# EAGLE board lesion-256 (EAGLE 8.3.2)
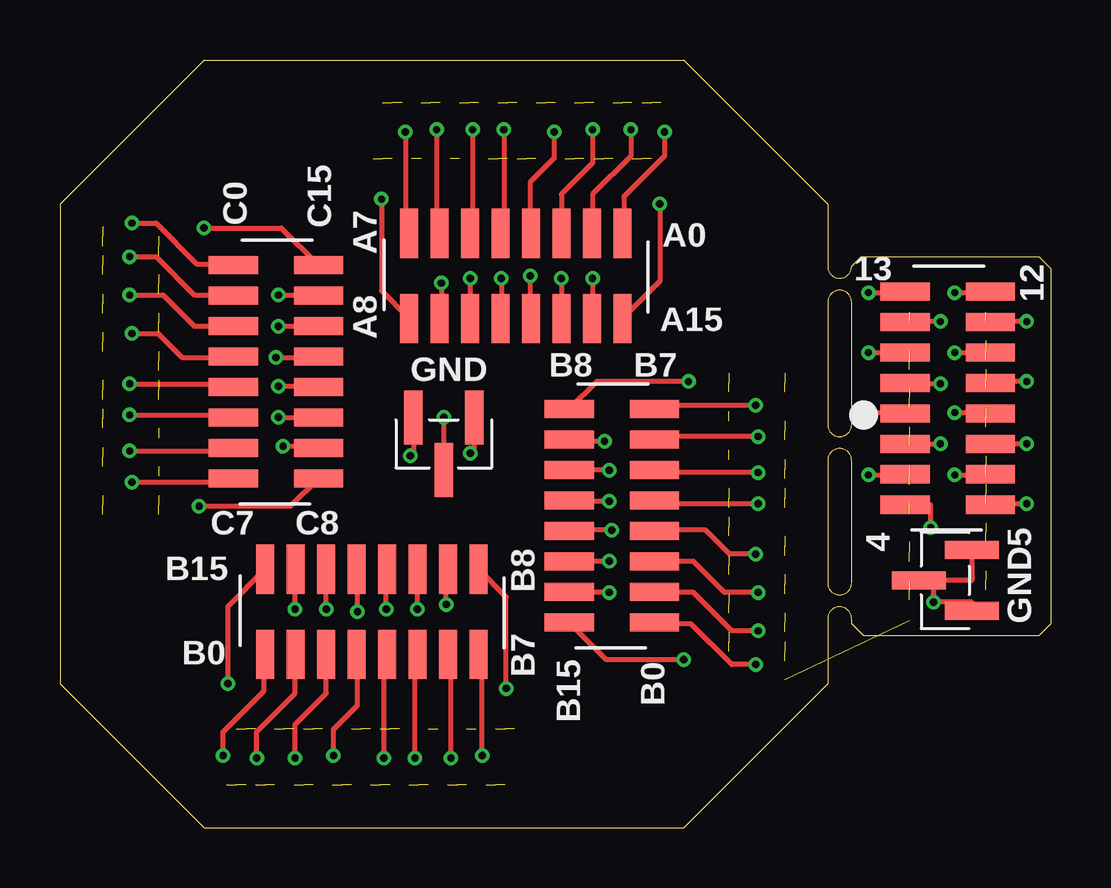
[diagram p0: board, top side]
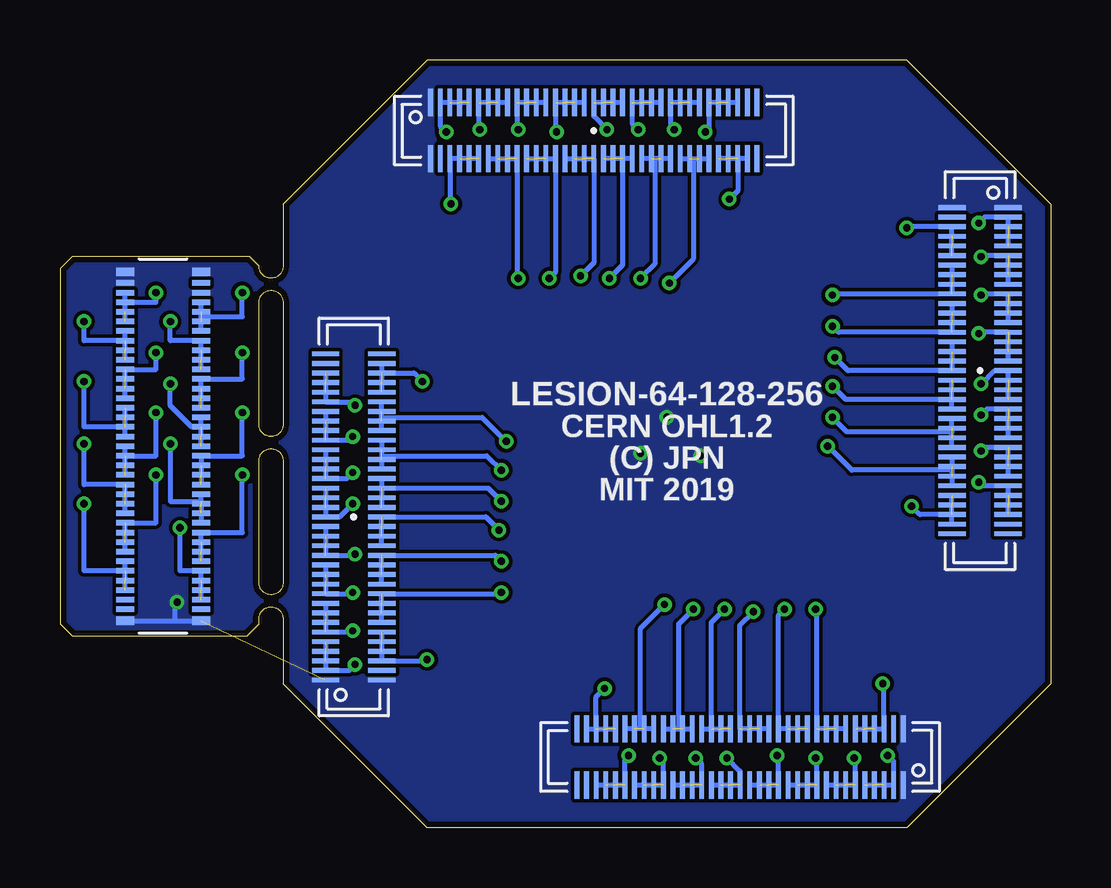
[diagram p1: board, bottom side, seen from below]

Size 41.3 x 32 mm. Coordinates in mm from the lower left corner, seen from the top.
Outline: 32,26 26,32 6,32 0,26 0,6 6,0 26,0 32,6 32,8.7 arc-90 32.5,9.2 arc-90 33,8.7 33,8.5 33.5,8 40.8,8 41.3,8.5 41.3,23.3 40.8,23.8 33.4,23.8 33,23.4 arc-90 32.5,22.9 arc-90 32,23.4 32,26
Outline: 33,21.9 arc90 32.5,22.4 arc90 32,21.9 32,16.8 arc90 32.5,16.3 arc90 33,16.8 33,21.9
Outline: 33,15.3 arc90 32.5,15.8 arc90 32,15.3 32,10.2 arc90 32.5,9.7 arc90 33,10.2 33,15.3
Copper layers (1*16): Top 0.035mm / dielectric 1.5mm / Bottom 0.035mm
Design rules "seeed-studio-2-layer *": minimum track width 6mil, minimum drill 0.3mm, track to track 6mil, track to pad 6mil, pad to pad 6mil, via to via 6mil, smd to smd 0mil, copper to edge 10mil, drill to drill 10mil, minimum pad ring 10mil, minimum via ring 6mil, stop-mask expansion 2mil, vias tented up to drill 100mil, thermal gap 10mil
Net classes: 1 thick: width 0.102 mm
tRestrict: 8 lines

## Footprints (pad centres in the part's own frame; a part is rotated, then mirrored left to right if it is on the bottom)
DF40-70HEAD-LESS-SILK = smd 0.23 x 0.75: 1 -6.8,-1.585; 2 -6.4,-1.585; 3 -6,-1.585; 4 -5.6,-1.585; 5 -5.2,-1.585; 6 -4.8,-1.585; 7 -4.4,-1.585; 8 -4,-1.585; 9 -3.6,-1.585; 10 -3.2,-1.585; 11 -2.8,-1.585; 12 -2.4,-1.585; 13 -2,-1.585; 14 -1.6,-1.585; 15 -1.2,-1.585; 16 -0.8,-1.585; 17 -0.4,-1.585; 18 0,-1.585; 19 0.4,-1.585; 20 0.8,-1.585; 21 1.2,-1.585; 22 1.6,-1.585; 23 2,-1.585; 24 2.4,-1.585; 25 2.8,-1.585; 26 3.2,-1.585; 27 3.6,-1.585; 28 4,-1.585; 29 4.4,-1.585; 30 4.8,-1.585; 31 5.2,-1.585; 32 5.6,-1.585; 33 6,-1.585; 34 6.4,-1.585; 35 6.8,-1.585; 36 6.8,1.585; 37 6.4,1.585; 38 6,1.585; 39 5.6,1.585; 40 5.2,1.585; 41 4.8,1.585; 42 4.4,1.585; 43 4,1.585; 44 3.6,1.585; 45 3.2,1.585; 46 2.8,1.585; 47 2.4,1.585; 48 2,1.585; 49 1.6,1.585; 50 1.2,1.585; 51 0.8,1.585; 52 0.4,1.585; 53 0,1.585; 54 -0.4,1.585; 55 -0.8,1.585; 56 -1.2,1.585; 57 -1.6,1.585; 58 -2,1.585; 59 -2.4,1.585; 60 -2.8,1.585; 61 -3.2,1.585; 62 -3.6,1.585; 63 -4,1.585; 64 -4.4,1.585; 65 -4.8,1.585; 66 -5.2,1.585; 67 -5.6,1.585; 68 -6,1.585; 69 -6.4,1.585; 70 -6.8,1.585 | smd 0.35 x 0.75: M1 -7.275,-1.585; M2 7.275,-1.585; M3 7.275,1.585; M4 -7.275,1.585
JP2X8_SMD_0.5" = smd 0.76 x 2.05: 1 -4.445,-1.775; 2 -3.175,-1.775; 3 -1.905,-1.775; 4 -0.635,-1.775; 5 0.635,-1.775; 6 1.905,-1.775; 7 3.175,-1.775; 8 4.445,-1.775; 9 4.445,1.775; 10 3.175,1.775; 11 1.905,1.775; 12 0.635,1.775; 13 -0.635,1.775; 14 -1.905,1.775; 15 -3.175,1.775; 16 -4.445,1.775
JP3_SMD-0.05 = smd 0.76 x 2.25: 1 -1.27,1.1; 2 0,-1.1; 3 1.27,1.1
DF40-70REC = smd 0.2 x 1.14: 1 -6.8,1.17; 2 -6.4,1.17; 3 -6,1.17; 4 -5.6,1.17; 5 -5.2,1.17; 6 -4.8,1.17; 7 -4.4,1.17; 8 -4,1.17; 9 -3.6,1.17; 10 -3.2,1.17; 11 -2.8,1.17; 12 -2.4,1.17; 13 -2,1.17; 14 -1.6,1.17; 15 -1.2,1.17; 16 -0.8,1.17; 17 -0.4,1.17; 18 0,1.17; 19 0.4,1.17; 20 0.8,1.17; 21 1.2,1.17; 22 1.6,1.17; 23 2,1.17; 24 2.4,1.17; 25 2.8,1.17; 26 3.2,1.17; 27 3.6,1.17; 28 4,1.17; 29 4.4,1.17; 30 4.8,1.17; 31 5.2,1.17; 32 5.6,1.17; 33 6,1.17; 34 6.4,1.17; 35 6.8,1.17; 36 6.8,-1.17; 37 6.4,-1.17; 38 6,-1.17; 39 5.6,-1.17; 40 5.2,-1.17; 41 4.8,-1.17; 42 4.4,-1.17; 43 4,-1.17; 44 3.6,-1.17; 45 3.2,-1.17; 46 2.8,-1.17; 47 2.4,-1.17; 48 2,-1.17; 49 1.6,-1.17; 50 1.2,-1.17; 51 0.8,-1.17; 52 0.4,-1.17; 53 0,-1.17; 54 -0.4,-1.17; 55 -0.8,-1.17; 56 -1.2,-1.17; 57 -1.6,-1.17; 58 -2,-1.17; 59 -2.4,-1.17; 60 -2.8,-1.17; 61 -3.2,-1.17; 62 -3.6,-1.17; 63 -4,-1.17; 64 -4.4,-1.17; 65 -4.8,-1.17; 66 -5.2,-1.17; 67 -5.6,-1.17; 68 -6,-1.17; 69 -6.4,-1.17; 70 -6.8,-1.17

## Placement (x,y rotation side)
J1  DF40C-70DP-0.4V(51)  [DF40-70HEAD-LESS-SILK]  37,15.9 270 bottom
J2  [JP2X8_SMD_0.5"]  9,19 270 top
J3  [JP2X8_SMD_0.5"]  19,23 180 top
J4  [JP2X8_SMD_0.5"]  37,17.9 90 top
J5  [JP3_SMD-0.05]  16,16 0 top
J6  [JP2X8_SMD_0.5"]  23,13 90 top
J7  [JP3_SMD-0.05]  36.9,10.3 270 top
J8  [JP2X8_SMD_0.5"]  13,9 0 top
JA1  DF40C(2.0)-70DS-0.4V(51)  [DF40-70REC]  2.95,19.05 270 bottom
JA3  DF40C(2.0)-70DS-0.4V(51)  [DF40-70REC]  19.05,29.05 0 bottom
JA5  DF40C(2.0)-70DS-0.4V(51)  [DF40-70REC]  29.05,12.95 90 bottom
JA7  DF40C(2.0)-70DS-0.4V(51)  [DF40-70REC]  12.95,2.95 180 bottom

## Library data of the parts
J1-J8 JA1 JA3 JA5 JA7 = jonnew

## Nets
AGND: J1.1 J1.69 J1.M1 J1.M2 J1.M3 J1.M4 J5.1 J5.2 J5.3 J7.1 J7.2 J7.3 JA1.1 JA1.70 JA3.1 JA3.70 JA5.1 JA5.70 JA7.1 JA7.70
N$1: J1.53 J1.54 J1.55 J1.56 J4.12
N$2: J1.57 J1.58 J1.59 J1.60 J4.11
N$3: J1.61 J1.62 J1.63 J1.64 J4.10
N$4: J1.2 J1.3 J1.4 J1.5 J4.8
N$5: J1.65 J1.66 J1.67 J1.68 J4.9
N$6: J1.10 J1.11 J1.12 J1.13 J4.6
N$7: J1.14 J1.15 J1.16 J1.17 J4.5
N$8: J1.18 J1.19 J1.20 J1.21 J4.4
N$9: J1.22 J1.23 J1.24 J1.25 J4.3
N$10: J1.26 J1.27 J1.28 J1.29 J4.2
N$11: J1.30 J1.31 J1.32 J1.33 J4.1
N$12: J1.37 J1.38 J1.39 J1.40 J4.16
N$13: J1.41 J1.42 J1.43 J1.44 J4.15
N$14: J1.45 J1.46 J1.47 J1.48 J4.14
N$15: J1.49 J1.50 J1.51 J1.52 J4.13
N$16: J2.1 JA1.2 JA1.3 JA1.4 JA1.5
N$17: J2.2 JA1.6 JA1.7 JA1.8 JA1.9
N$18: J2.3 JA1.10 JA1.11 JA1.12 JA1.13
N$19: J2.4 JA1.14 JA1.15 JA1.16 JA1.17
N$20: J2.5 JA1.18 JA1.19 JA1.20 JA1.21
N$21: J2.6 JA1.22 JA1.23 JA1.24 JA1.25
N$22: J2.7 JA1.26 JA1.27 JA1.28 JA1.29
N$23: J2.8 JA1.30 JA1.31 JA1.32 JA1.33
N$24: J2.9 JA1.37 JA1.38 JA1.39 JA1.40
N$25: J2.10 JA1.41 JA1.42 JA1.43 JA1.44
N$26: J2.11 JA1.45 JA1.46 JA1.47 JA1.48
N$27: J2.12 JA1.49 JA1.50 JA1.51 JA1.52
N$28: J2.13 JA1.53 JA1.54 JA1.55 JA1.56
N$29: J2.14 JA1.57 JA1.58 JA1.59 JA1.60
N$30: J2.15 JA1.61 JA1.62 JA1.63 JA1.64
N$31: J2.16 JA1.65 JA1.66 JA1.67 JA1.68
N$32: J1.6 J1.7 J1.8 J1.9 J4.7
N$33: J3.1 JA3.2 JA3.3 JA3.4 JA3.5
N$34: J3.2 JA3.6 JA3.7 JA3.8 JA3.9
N$35: J3.3 JA3.10 JA3.11 JA3.12 JA3.13
N$36: J3.4 JA3.14 JA3.15 JA3.16 JA3.17
N$37: J3.5 JA3.18 JA3.19 JA3.20 JA3.21
N$38: J3.6 JA3.22 JA3.23 JA3.24 JA3.25
N$39: J3.7 JA3.26 JA3.27 JA3.28 JA3.29
N$40: J3.8 JA3.30 JA3.31 JA3.32 JA3.33
N$41: J3.9 JA3.37 JA3.38 JA3.39 JA3.40
N$42: J3.10 JA3.41 JA3.42 JA3.43 JA3.44
N$43: J3.11 JA3.45 JA3.46 JA3.47 JA3.48
N$44: J3.12 JA3.49 JA3.50 JA3.51 JA3.52
N$45: J3.13 JA3.53 JA3.54 JA3.55 JA3.56
N$46: J3.14 JA3.57 JA3.58 JA3.59 JA3.60
N$47: J3.15 JA3.61 JA3.62 JA3.63 JA3.64
N$48: J3.16 JA3.65 JA3.66 JA3.67 JA3.68
N$65: J6.1 JA5.2 JA5.3 JA5.4 JA5.5
N$66: J6.2 JA5.6 JA5.7 JA5.8 JA5.9
N$67: J6.3 JA5.10 JA5.11 JA5.12 JA5.13
N$68: J6.4 JA5.14 JA5.15 JA5.16 JA5.17
N$69: J6.5 JA5.18 JA5.19 JA5.20 JA5.21
N$70: J6.6 JA5.22 JA5.23 JA5.24 JA5.25
N$71: J6.7 JA5.26 JA5.27 JA5.28 JA5.29
N$72: J6.8 JA5.30 JA5.31 JA5.32 JA5.33
N$73: J6.9 JA5.37 JA5.38 JA5.39 JA5.40
N$74: J6.10 JA5.41 JA5.42 JA5.43 JA5.44
N$75: J6.11 JA5.45 JA5.46 JA5.47 JA5.48
N$76: J6.12 JA5.49 JA5.50 JA5.51 JA5.52
N$77: J6.13 JA5.53 JA5.54 JA5.55 JA5.56
N$78: J6.14 JA5.57 JA5.58 JA5.59 JA5.60
N$79: J6.15 JA5.61 JA5.62 JA5.63 JA5.64
N$80: J6.16 JA5.65 JA5.66 JA5.67 JA5.68
N$97: J8.1 JA7.2 JA7.3 JA7.4 JA7.5
N$98: J8.2 JA7.6 JA7.7 JA7.8 JA7.9
N$99: J8.3 JA7.10 JA7.11 JA7.12 JA7.13
N$100: J8.4 JA7.14 JA7.15 JA7.16 JA7.17
N$101: J8.5 JA7.18 JA7.19 JA7.20 JA7.21
N$102: J8.6 JA7.22 JA7.23 JA7.24 JA7.25
N$103: J8.7 JA7.26 JA7.27 JA7.28 JA7.29
N$104: J8.8 JA7.30 JA7.31 JA7.32 JA7.33
N$105: J8.9 JA7.37 JA7.38 JA7.39 JA7.40
N$106: J8.10 JA7.41 JA7.42 JA7.43 JA7.44
N$107: J8.11 JA7.45 JA7.46 JA7.47 JA7.48
N$108: J8.12 JA7.49 JA7.50 JA7.51 JA7.52
N$109: J8.13 JA7.53 JA7.54 JA7.55 JA7.56
N$110: J8.14 JA7.57 JA7.58 JA7.59 JA7.60
N$111: J8.15 JA7.61 JA7.62 JA7.63 JA7.64
N$112: J8.16 JA7.65 JA7.66 JA7.67 JA7.68

## Tracks (layer width: path | path; a pad name or v marks a point on that pad's centre or on a via)
AGND  (via drill 0.3)  (1 unrouted)
  Top 0.2: J5.2 v16,17.1 | J5.1 14.73,15.63 v14.6,15.5 | J5.3 17.27,15.77 v17.1,15.6 | J7.3 38,9.4 v36.42,9.4 36.42,10.3 | 36.42,10.3 J7.2 | J7.1 38,10.3 36.42,10.3
  Bottom 0.2: J1.M2 J1.M3 | 36.5,8.62 36.5,9.4 v36.42,9.4
  pour Bottom (no thermals): -11.7,42.3 51.3,42.3 51.3,-19 -20.9,-37.4
N$1  (via drill 0.3)  (2 unrouted)
  Top 0.2: v36.7,18.5 35.23,18.5 J4.12
  Bottom 0.2: J1.53 J1.56 | v36.7,18.5 36.7,17.59 35.81,16.7 J1.55
N$2  (via drill 0.3)  (2 unrouted)
  Top 0.2: v33.7,19.8 J4.11
  Bottom 0.2: J1.57 J1.60 33.7,18.7 v33.7,19.8
N$3  (via drill 0.3)  (2 unrouted)
  Top 0.2: v36.7,21.1 35.23,21.1 J4.10
  Bottom 0.2: J1.61 J1.64 36.7,20.3 v36.7,21.1
N$4  (via drill 0.3)  (1 unrouted)
  Top 0.2: v37.3,22.3 38.77,22.3 J4.8
  Bottom 0.2: J1.5 J1.3 | J1.3 J1.2 | J1.3 37.3,21.9 v37.3,22.3
N$5  (via drill 0.3)  (2 unrouted)
  Top 0.2: v33.7,22.3 35.23,22.3 J4.9
  Bottom 0.2: J1.65 35.41,21.3 | 35.41,21.3 J1.68 | 35.41,21.3 33.7,21.3 v33.7,22.3
N$6  (via drill 0.3)  (2 unrouted)
  Top 0.2: v37.3,19.8 J4.6
  Bottom 0.2: J1.13 J1.10 37.3,19.1 v37.3,19.8
N$7  (via drill 0.3)  (2 unrouted)
  Top 0.2: v40.3,18.6 38.77,18.6 J4.5
  Bottom 0.2: J1.17 J1.14 | J1.16 40.3,16.7 v40.3,18.6
N$8  (via drill 0.3)  (2 unrouted)
  Top 0.2: v37.3,17.3 38.77,17.3 J4.4
  Bottom 0.2: J1.21 J1.18 | J1.19 37.3,15.5 v37.3,17.3
N$9  (via drill 0.3)  (2 unrouted)
  Top 0.2: v40.3,16 J4.3
  Bottom 0.2: J1.25 J1.22 40.3,14.3 v40.3,16
N$10  (via drill 0.3)  (2 unrouted)
  Top 0.2: v37.3,14.7 38.77,14.7 | 39.5,14.7 38.77,14.7 | 38.77,14.7 J4.2
  Bottom 0.2: J1.29 J1.26 37.3,12.7 v37.3,14.7
N$11  (via drill 0.3)  (2 unrouted)
  Top 0.2: v40.3,13.5 38.77,13.5 J4.1
  Bottom 0.2: J1.33 J1.30 | J1.31 40.3,10.7 v40.3,13.5
N$12  (via drill 0.3)  (2 unrouted)
  Top 0.2: v36.3,12.5 36.3,13.46 J4.16
  Bottom 0.2: J1.37 J1.40 36.3,10.7 v36.3,12.5
N$13  (via drill 0.3)  (2 unrouted)
  Top 0.2: v33.7,14.7 35.23,14.7 J4.15
  Bottom 0.2: J1.41 J1.44 33.7,12.3 v33.7,14.7
N$14  (via drill 0.3)  (2 unrouted)
  Top 0.2: J4.14 v36.7,15.99 v36.7,16
  Bottom 0.2: 35.41,13.6 J1.45 | 35.41,13.6 J1.48 | v36.7,16 36.7,13.6 35.41,13.6
N$15  (via drill 0.3)  (2 unrouted)
  Top 0.2: v33.7,17.3 35.23,17.3 J4.13
  Bottom 0.2: J1.49 J1.52 33.7,15.5 v33.7,17.3
N$16  (via drill 0.3)  (2 unrouted)
  Top 0.2: v3,25.2 4,25.2 5.7,23.5 7.17,23.5 J2.1
  Bottom 0.2: JA1.5 JA1.2 2.75,25.45 v3,25.2
N$17  (via drill 0.3)  (2 unrouted)
  Top 0.2: v2.9,23.8 4,23.8 5.6,22.2 7.2,22.2 J2.2
  Bottom 0.2: JA1.9 JA1.6 2.85,23.85 v2.9,23.8
N$18  (via drill 0.3)  (2 unrouted)
  Top 0.2: v2.9,22.2 4.3,22.2 5.6,20.9 J2.3
  Bottom 0.2: JA1.13 JA1.10 2.85,22.25 v2.9,22.2
N$19  (via drill 0.3)  (2 unrouted)
  Top 0.2: v3,20.6 4.1,20.6 5.1,19.6 7.19,19.6 J2.4
  Bottom 0.2: JA1.17 JA1.14 2.95,20.65 v3,20.6
N$20  (via drill 0.3)  (2 unrouted)
  Top 0.2: v2.9,18.5 7.09,18.5 J2.5
  Bottom 0.2: JA1.21 JA1.18 2.35,19.05 v2.9,18.5
N$21  (via drill 0.3)  (2 unrouted)
  Top 0.2: v2.9,17.2 7.12,17.2 J2.6
  Bottom 0.2: JA1.25 JA1.22 2.65,17.45 v2.9,17.2
N$22  (via drill 0.3)  (2 unrouted)
  Top 0.2: v2.9,15.7 7.1,15.7 J2.7
  Bottom 0.2: JA1.29 JA1.26 2.75,15.85 v2.9,15.7
N$23  (via drill 0.3)  (2 unrouted)
  Top 0.2: v3,14.4 7.07,14.4 J2.8
  Bottom 0.2: JA1.33 JA1.30 2.85,14.25 v3,14.4
N$24  (via drill 0.3)  (2 unrouted)
  Top 0.2: v5.8,13.4 9.62,13.4 J2.9
  Bottom 0.2: JA1.37 JA1.40 | JA1.38 5.45,13.05 v5.8,13.4
N$25  (via drill 0.3)  (2 unrouted)
  Top 0.2: v9.3,15.9 10.7,15.9 J2.10
  Bottom 0.2: JA1.44 4.12,14.9 | 4.12,14.9 JA1.41 | 4.12,14.9 8.3,14.9 v9.3,15.9
N$26  (via drill 0.3)  (2 unrouted)
  Top 0.2: v9.1,17.1 J2.11
  Bottom 0.2: JA1.45 4.12,16.5 | 4.12,16.5 JA1.48 | 4.12,16.5 8.5,16.5 v9.1,17.1
N$27  (via drill 0.3)  (2 unrouted)
  Top 0.2: v9.1,18.4 10.74,18.4 J2.12
  Bottom 0.2: JA1.49 JA1.52 | JA1.50 8.55,17.85 v9.1,18.4
N$28  (via drill 0.3)  (2 unrouted)
  Top 0.2: v9,19.6 10.74,19.6 J2.13
  Bottom 0.2: JA1.56 JA1.53 8.45,19.05 v9,19.6
N$29  (via drill 0.3)  (2 unrouted)
  Top 0.2: v9.1,20.9 J2.14
  Bottom 0.2: JA1.60 JA1.57 8.85,20.65 v9.1,20.9
N$30  (via drill 0.3)  (2 unrouted)
  Top 0.2: v9.1,22.2 10.75,22.2 J2.15
  Bottom 0.2: JA1.64 JA1.61 9.05,22.25 v9.1,22.2
N$31  (via drill 0.3)  (2 unrouted)
  Top 0.2: v6,25 9.22,25 J2.16
  Bottom 0.2: JA1.65 JA1.68 5.95,25.05 v6,25
N$32  (via drill 0.3)  (2 unrouted)
  Top 0.2: v40.3,21.1 38.77,21.1 J4.7
  Bottom 0.2: J1.9 J1.6 | J1.7 40.3,20.3 v40.3,21.1
N$33  (via drill 0.3)  (2 unrouted)
  Top 0.2: v25.2,29 25.2,28 23.5,26.3 23.5,24.83 J3.1
  Bottom 0.2: JA3.5 JA3.2 25.45,29.25 v25.2,29
N$34  (via drill 0.3)  (2 unrouted)
  Top 0.2: v23.8,29.1 23.8,28 22.2,26.4 22.2,24.8 J3.2
  Bottom 0.2: JA3.9 JA3.6 23.85,29.15 v23.8,29.1
N$35  (via drill 0.3)  (2 unrouted)
  Top 0.2: v22.2,29.1 22.2,27.7 20.9,26.4 J3.3
  Bottom 0.2: JA3.13 JA3.10 22.25,29.15 v22.2,29.1
N$36  (via drill 0.3)  (2 unrouted)
  Top 0.2: v20.6,29 20.6,27.9 19.6,26.9 19.6,24.81 J3.4
  Bottom 0.2: JA3.17 JA3.14 20.65,29.05 v20.6,29
N$37  (via drill 0.3)  (2 unrouted)
  Top 0.2: v18.5,29.1 18.5,24.91 J3.5
  Bottom 0.2: JA3.21 JA3.18 19.05,29.65 v18.5,29.1
N$38  (via drill 0.3)  (2 unrouted)
  Top 0.2: v17.2,29.1 17.2,24.88 J3.6
  Bottom 0.2: JA3.25 JA3.22 17.45,29.35 v17.2,29.1
N$39  (via drill 0.3)  (2 unrouted)
  Top 0.2: v15.7,29.1 15.7,24.9 J3.7
  Bottom 0.2: JA3.29 JA3.26 15.85,29.25 v15.7,29.1
N$40  (via drill 0.3)  (2 unrouted)
  Top 0.2: v14.4,29 14.4,24.93 J3.8
  Bottom 0.2: JA3.33 JA3.30 14.25,29.15 v14.4,29
N$41  (via drill 0.3)  (2 unrouted)
  Top 0.2: v13.4,26.2 13.4,22.38 J3.9
  Bottom 0.2: JA3.37 JA3.40 | JA3.38 13.05,26.55 v13.4,26.2
N$42  (via drill 0.3)  (2 unrouted)
  Top 0.2: v15.9,22.7 15.9,21.3 J3.10
  Bottom 0.2: JA3.44 14.9,27.88 | 14.9,27.88 JA3.41 | 14.9,27.88 14.9,23.7 v15.9,22.7
N$43  (via drill 0.3)  (2 unrouted)
  Top 0.2: v17.1,22.9 J3.11
  Bottom 0.2: JA3.45 16.5,27.88 | 16.5,27.88 JA3.48 | 16.5,27.88 16.5,23.5 v17.1,22.9
N$44  (via drill 0.3)  (2 unrouted)
  Top 0.2: v18.4,22.9 18.4,21.26 J3.12
  Bottom 0.2: JA3.49 JA3.52 | JA3.50 17.85,23.45 v18.4,22.9
N$45  (via drill 0.3)  (2 unrouted)
  Top 0.2: v19.6,23 19.6,21.26 J3.13
  Bottom 0.2: JA3.56 JA3.53 19.05,23.55 v19.6,23
N$46  (via drill 0.3)  (2 unrouted)
  Top 0.2: v20.9,22.9 J3.14
  Bottom 0.2: JA3.60 JA3.57 20.65,23.15 v20.9,22.9
N$47  (via drill 0.3)  (2 unrouted)
  Top 0.2: v22.2,22.9 22.2,21.25 J3.15
  Bottom 0.2: JA3.64 JA3.61 22.25,22.95 v22.2,22.9
N$48  (via drill 0.3)  (2 unrouted)
  Top 0.2: v25,26 25,22.78 J3.16
  Bottom 0.2: JA3.65 JA3.68 25.05,26.05 v25,26
N$65  (via drill 0.3)  (2 unrouted)
  Top 0.2: v29,6.8 28,6.8 26.3,8.5 24.83,8.5 J6.1
  Bottom 0.2: JA5.5 JA5.2 29.25,6.55 v29,6.8
N$66  (via drill 0.3)  (2 unrouted)
  Top 0.2: v29.1,8.2 28,8.2 26.4,9.8 24.8,9.8 J6.2
  Bottom 0.2: JA5.9 JA5.6 29.15,8.15 v29.1,8.2
N$67  (via drill 0.3)  (2 unrouted)
  Top 0.2: v29.1,9.8 27.7,9.8 26.4,11.1 J6.3
  Bottom 0.2: JA5.13 JA5.10 29.15,9.75 v29.1,9.8
N$68  (via drill 0.3)  (2 unrouted)
  Top 0.2: v29,11.4 27.9,11.4 26.9,12.4 24.81,12.4 J6.4
  Bottom 0.2: JA5.17 JA5.14 29.05,11.35 v29,11.4
N$69  (via drill 0.3)  (2 unrouted)
  Top 0.2: v29.1,13.5 24.91,13.5 J6.5
  Bottom 0.2: JA5.21 JA5.18 29.65,12.95 v29.1,13.5
N$70  (via drill 0.3)  (2 unrouted)
  Top 0.2: v29.1,14.8 24.88,14.8 J6.6
  Bottom 0.2: JA5.25 JA5.22 29.35,14.55 v29.1,14.8
N$71  (via drill 0.3)  (2 unrouted)
  Top 0.2: v29.1,16.3 24.9,16.3 J6.7
  Bottom 0.2: JA5.29 JA5.26 29.25,16.15 v29.1,16.3
N$72  (via drill 0.3)  (2 unrouted)
  Top 0.2: v29,17.6 24.93,17.6 J6.8
  Bottom 0.2: JA5.33 JA5.30 29.15,17.75 v29,17.6
N$73  (via drill 0.3)  (2 unrouted)
  Top 0.2: v26.2,18.6 22.38,18.6 J6.9
  Bottom 0.2: JA5.37 JA5.40 | JA5.38 26.55,18.95 v26.2,18.6
N$74  (via drill 0.3)  (2 unrouted)
  Top 0.2: v22.7,16.1 21.3,16.1 J6.10
  Bottom 0.2: JA5.44 27.88,17.1 | 27.88,17.1 JA5.41 | 27.88,17.1 23.7,17.1 v22.7,16.1
N$75  (via drill 0.3)  (2 unrouted)
  Top 0.2: v22.9,14.9 J6.11
  Bottom 0.2: JA5.45 27.88,15.5 | 27.88,15.5 JA5.48 | 27.88,15.5 23.5,15.5 v22.9,14.9
N$76  (via drill 0.3)  (2 unrouted)
  Top 0.2: v22.9,13.6 21.26,13.6 J6.12
  Bottom 0.2: JA5.49 JA5.52 | JA5.50 23.45,14.15 v22.9,13.6
N$77  (via drill 0.3)  (2 unrouted)
  Top 0.2: v23,12.4 21.26,12.4 J6.13
  Bottom 0.2: JA5.56 JA5.53 23.55,12.95 v23,12.4
N$78  (via drill 0.3)  (2 unrouted)
  Top 0.2: v22.9,11.1 J6.14
  Bottom 0.2: JA5.60 JA5.57 23.15,11.35 v22.9,11.1
N$79  (via drill 0.3)  (2 unrouted)
  Top 0.2: v22.9,9.8 21.25,9.8 J6.15
  Bottom 0.2: JA5.64 JA5.61 22.95,9.75 v22.9,9.8
N$80  (via drill 0.3)  (2 unrouted)
  Top 0.2: v26,7 22.78,7 J6.16
  Bottom 0.2: JA5.65 JA5.68 26.05,6.95 v26,7
N$97  (via drill 0.3)  (2 unrouted)
  Top 0.2: v6.8,3 6.8,4 8.5,5.7 8.5,7.17 J8.1
  Bottom 0.2: JA7.5 JA7.2 6.55,2.75 v6.8,3
N$98  (via drill 0.3)  (2 unrouted)
  Top 0.2: v8.2,2.9 8.2,4 9.8,5.6 9.8,7.2 J8.2
  Bottom 0.2: JA7.9 JA7.6 8.15,2.85 v8.2,2.9
N$99  (via drill 0.3)  (2 unrouted)
  Top 0.2: v9.8,2.9 9.8,4.3 11.1,5.6 J8.3
  Bottom 0.2: JA7.13 JA7.10 9.75,2.85 v9.8,2.9
N$100  (via drill 0.3)  (2 unrouted)
  Top 0.2: v11.4,3 11.4,4.1 12.4,5.1 12.4,7.19 J8.4
  Bottom 0.2: JA7.17 JA7.14 11.35,2.95 v11.4,3
N$101  (via drill 0.3)  (2 unrouted)
  Top 0.2: v13.5,2.9 13.5,7.09 J8.5
  Bottom 0.2: JA7.21 JA7.18 12.95,2.35 v13.5,2.9
N$102  (via drill 0.3)  (2 unrouted)
  Top 0.2: v14.8,2.9 14.8,7.12 J8.6
  Bottom 0.2: JA7.25 JA7.22 14.55,2.65 v14.8,2.9
N$103  (via drill 0.3)  (2 unrouted)
  Top 0.2: v16.3,2.9 16.3,7.1 J8.7
  Bottom 0.2: JA7.29 JA7.26 16.15,2.75 v16.3,2.9
N$104  (via drill 0.3)  (2 unrouted)
  Top 0.2: v17.6,3 17.6,7.07 J8.8
  Bottom 0.2: JA7.33 JA7.30 17.75,2.85 v17.6,3
N$105  (via drill 0.3)  (2 unrouted)
  Top 0.2: v18.6,5.8 18.6,9.62 J8.9
  Bottom 0.2: JA7.37 JA7.40 | JA7.38 18.95,5.45 v18.6,5.8
N$106  (via drill 0.3)  (2 unrouted)
  Top 0.2: v16.1,9.3 16.1,10.7 J8.10
  Bottom 0.2: JA7.44 17.1,4.12 | 17.1,4.12 JA7.41 | 17.1,4.12 17.1,8.3 v16.1,9.3
N$107  (via drill 0.3)  (2 unrouted)
  Top 0.2: v14.9,9.1 J8.11
  Bottom 0.2: JA7.45 15.5,4.12 | 15.5,4.12 JA7.48 | 15.5,4.12 15.5,8.5 v14.9,9.1
N$108  (via drill 0.3)  (2 unrouted)
  Top 0.2: v13.6,9.1 13.6,10.74 J8.12
  Bottom 0.2: JA7.49 JA7.52 | JA7.50 14.15,8.55 v13.6,9.1
N$109  (via drill 0.3)  (2 unrouted)
  Top 0.2: v12.4,9 12.4,10.74 J8.13
  Bottom 0.2: JA7.56 JA7.53 12.95,8.45 v12.4,9
N$110  (via drill 0.3)  (2 unrouted)
  Top 0.2: v11.1,9.1 J8.14
  Bottom 0.2: JA7.60 JA7.57 11.35,8.85 v11.1,9.1
N$111  (via drill 0.3)  (2 unrouted)
  Top 0.2: v9.8,9.1 9.8,10.75 J8.15
  Bottom 0.2: JA7.64 JA7.61 9.75,9.05 v9.8,9.1
N$112  (via drill 0.3)  (2 unrouted)
  Top 0.2: v7,6 7,9.22 J8.16
  Bottom 0.2: JA7.65 JA7.68 6.95,5.95 v7,6

## Text on the board
tPlace: C0 | C15 | A7 | A0 | 12 | 13 | A8 | A15 | B8 | B7 | GND | C7 | C8 | 4 | 5 | B15 | B8 | B0 | B7 | GND | B15 | B0
bPlace: LESION-64-128-256 | CERN OHL1.2 | (C) JPN | MIT 2019